# Altium PCB iotv3 595.PcbDoc
Units mm, origin at the board's own origin, x right, y up, seen from the top; angles counter-clockwise.
Board outline 152.4 x 101.6 mm, 2 copper layers (Top Layer, Bottom Layer); 7 components, 13 nets, 35 pads, 0 vias.
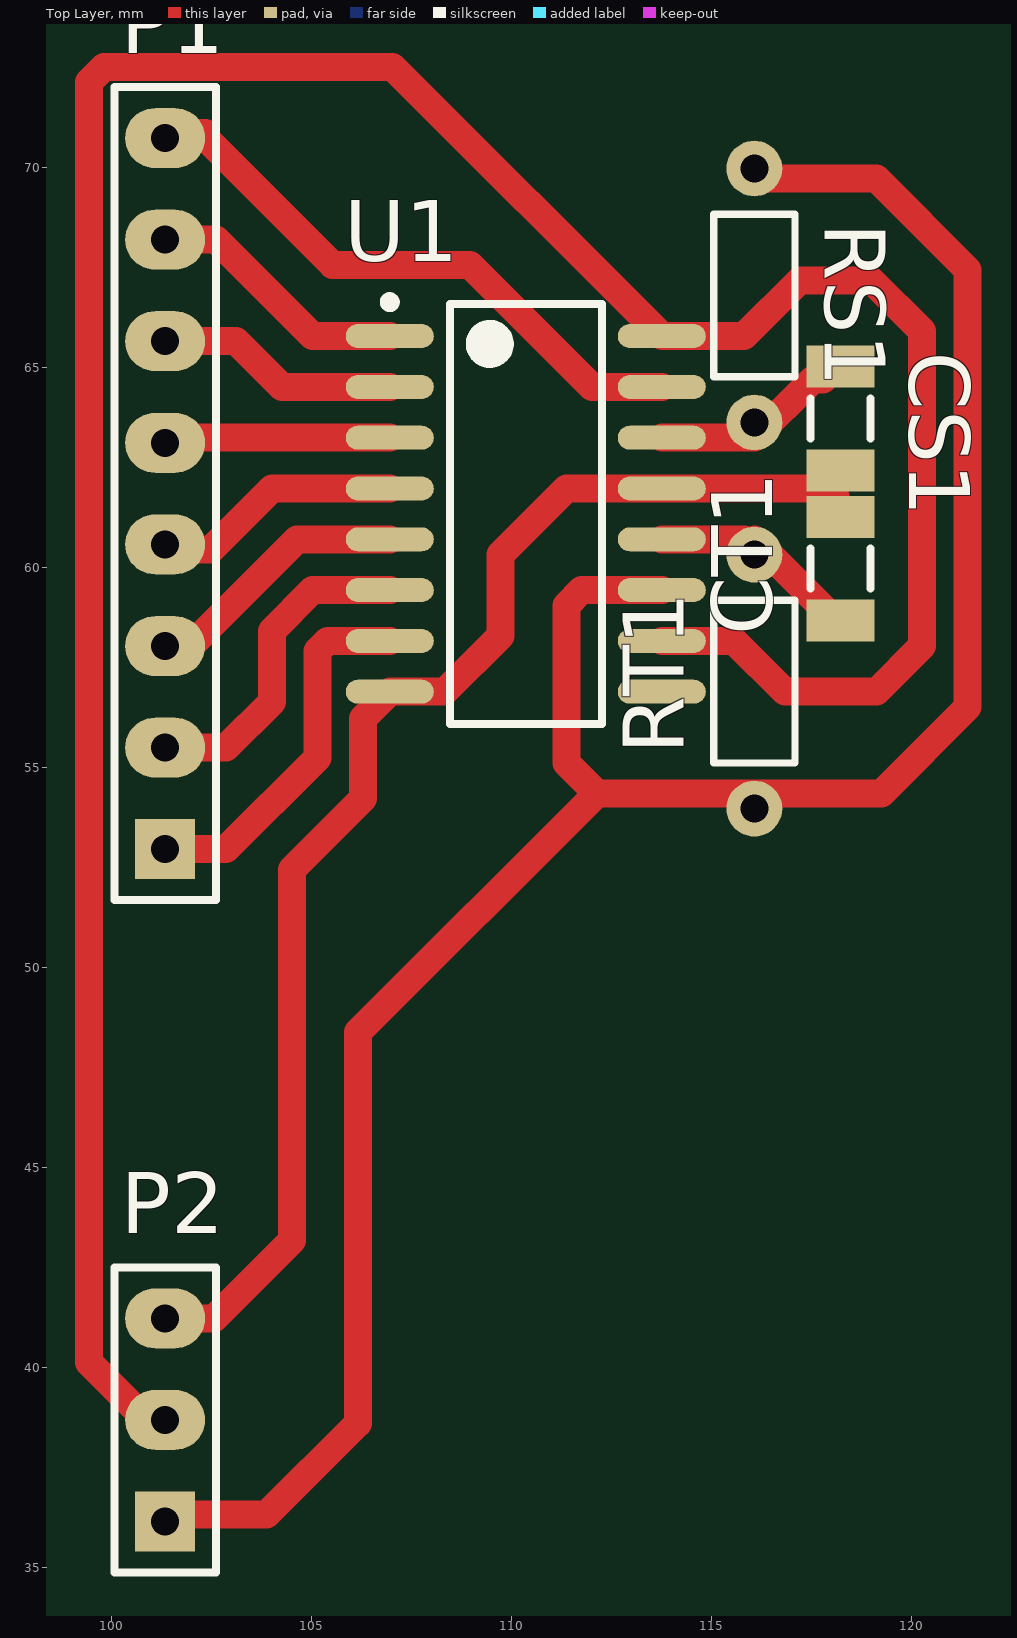
[diagram p0: Top Layer view]
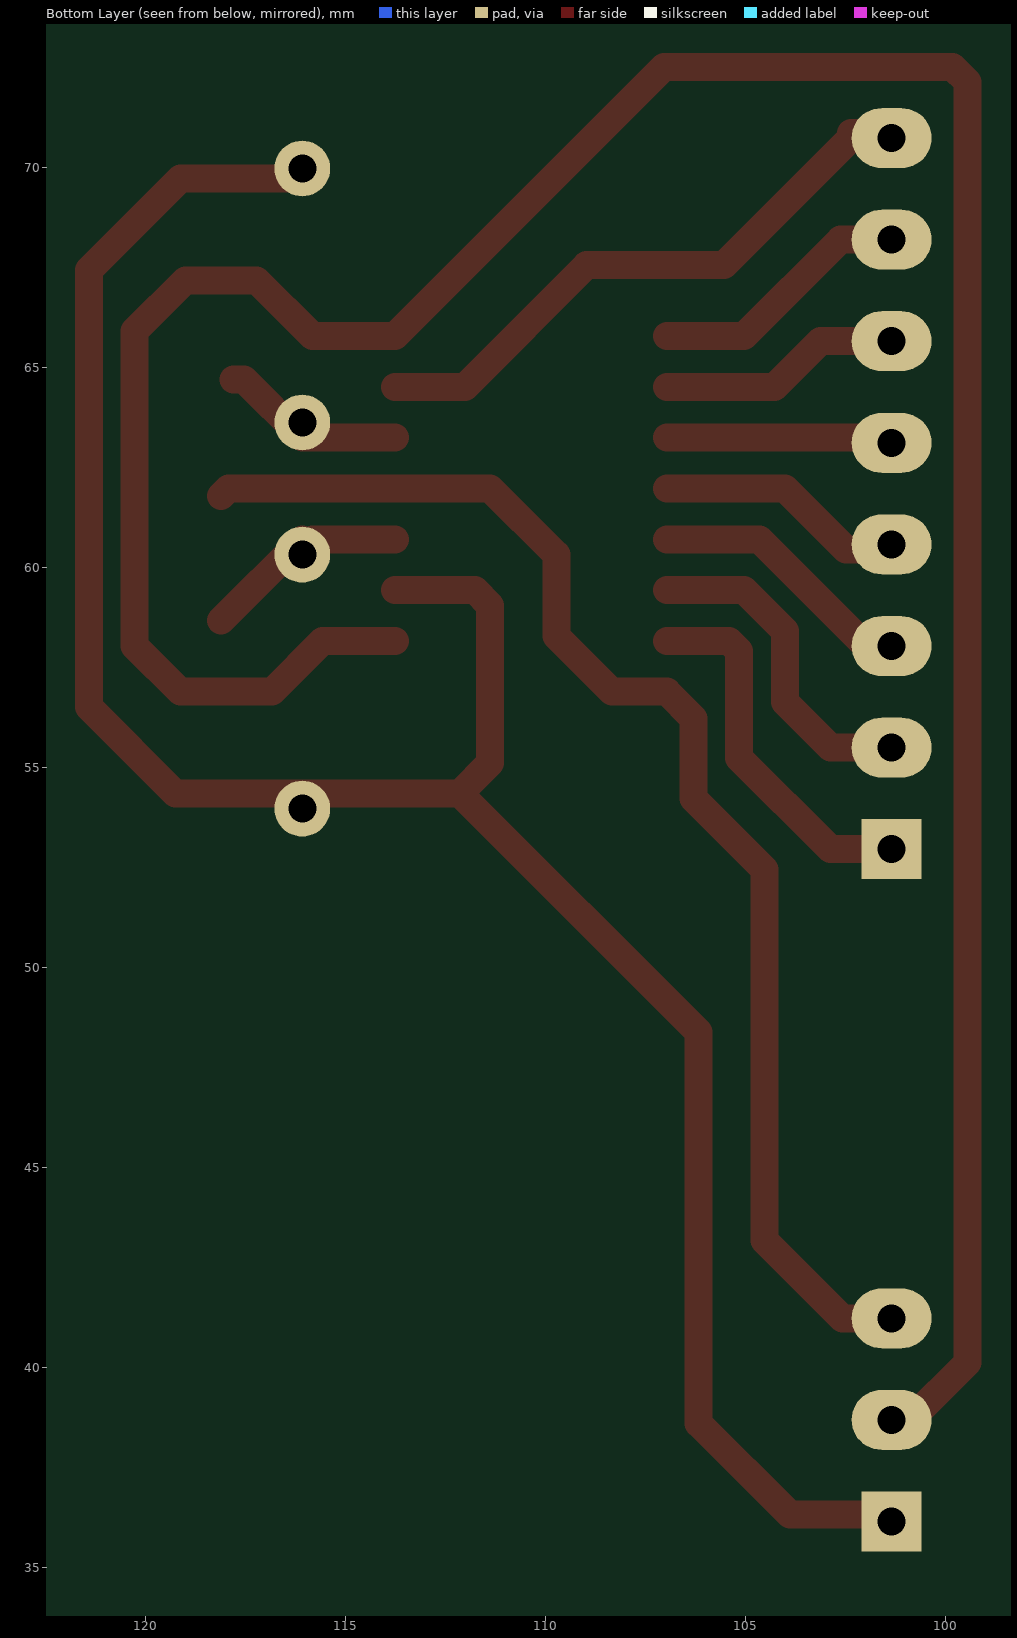
[diagram p1: Bottom Layer view, seen from below]
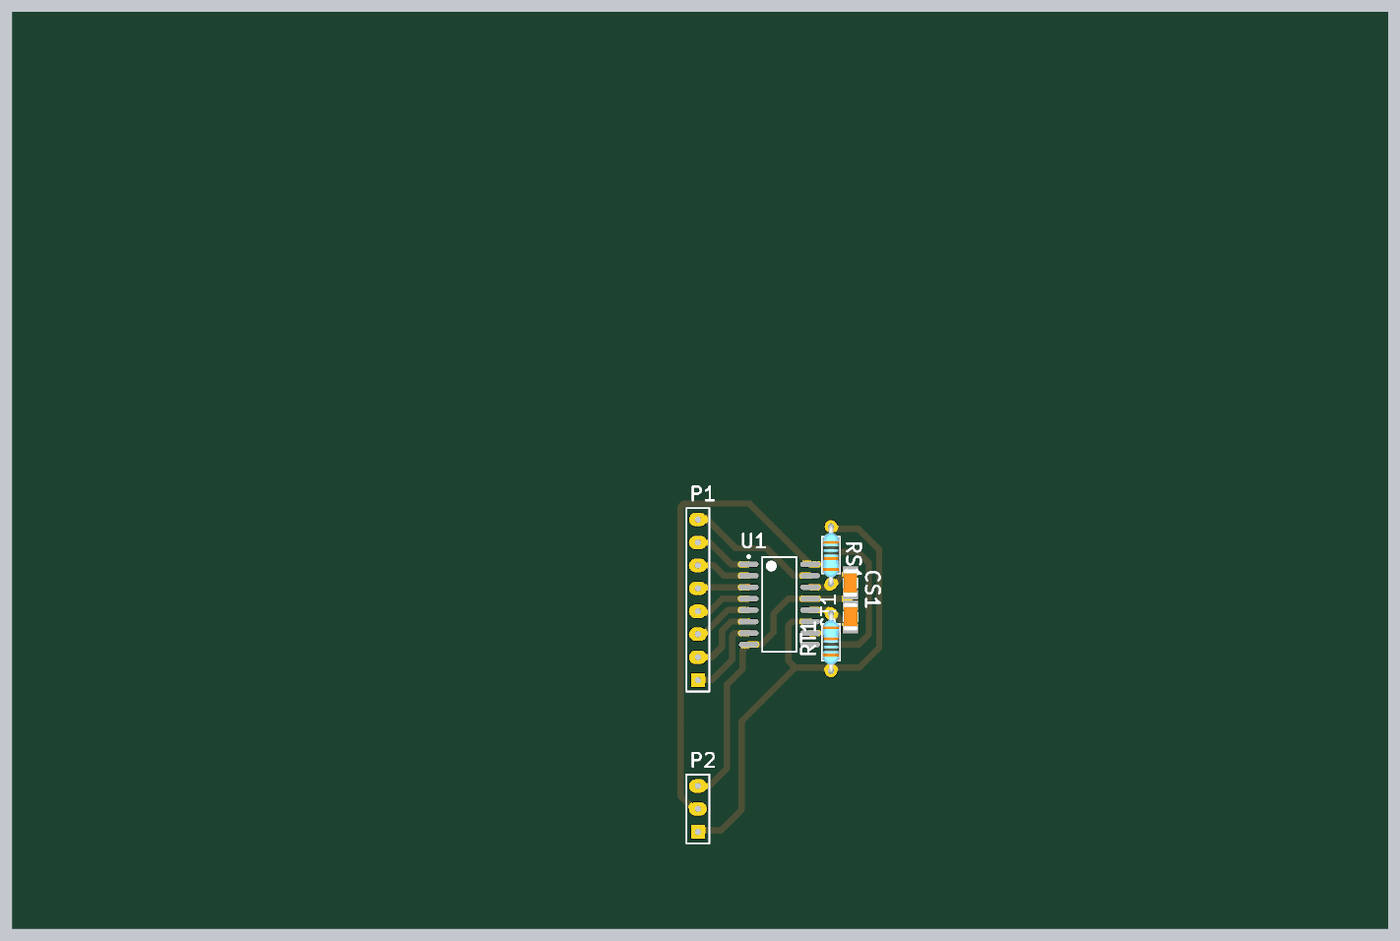
[diagram p2: 3D render of the assembled board from above, using the file's embedded part models]

## Layer stack, top to bottom
Top Solder: solder mask 0.0102, Solder Resist, Dk 3.5
Top Layer: signal copper 0.0356
Dielectric 1: dielectric 0.32, FR-4, Dk 4.8
Bottom Layer: signal copper 0.0356
Bottom Solder: solder mask 0.0102, Solder Resist, Dk 3.5

## Board outline
25.4,25.4 177.8,25.4 177.8,127 25.4,127

## Design rules (kind name [scope] priority, off if disabled: settings)
Clearance [All] p1: gap=0.254 ignorepadtopadclearanceinfootprint=FALSE except(0: Arc-Hole Track-Hole SMDPad-Hole THPad-Hole Via-Hole Fill-Hole Poly-Hole Region-Hole Text-Hole)
PolygonConnect [All] p1: connectstyle=Relief reliefconductorwidth=0.254 reliefentries=4 polygonreliefangle="90 Angle" airgapwidth=0.254
RoomDefinition "iotv3 595" [InComponentClass('iotv3 595')] p1: confinementstyle=ConfineIn formatcopy=TRUE lockcomponents=FALSE outline 178.943,24.384 218.694,24.384 218.694,47.752 178.943,47.752
RoutingVias [All] p1: holewidth=0.711 width=1.27 viastyle="Through Hole" minholewidth=0.711 minwidth=1.27 maxholewidth=0.711 maxwidth=1.27
SolderMaskExpansion [All] p1: expansion=0.102
Width [All] p1: maxlimit=2 minlimit=0.5 preferedwidth=1
30 further rules are at their usual default settings.

## Components (designator, comment, footprint, x,y, rotation, side; value= is the part's Value field where it differs from the comment)
CS1 "Value" "CAP 1206" 118.237,63.754 r270 top
CT1 "Value" "CAP 1206" 118.237,59.944 r90 top
P1 "Header 8" HDR1X8 101.346,52.959 r90 top
P2 "Header 3" HDR1X3 101.346,36.152 r90 top
RS1 "10K" Res-(1/4) 116.078,66.802 r270 top
RT1 "10K" Res-(1/4) 116.078,57.15 r90 top
U1 "MC74VHC595M" 966-01_N 110.363,61.341 r0 top

## Footprints (in the part's own frame and the unit in brackets; to place one, negate y for a bottom-side part, rotate by r counter-clockwise, add the part's x,y. Pads: shape width x height; smd on the part's side, far side on the other; paste and mask are expansions set on the pad)
966-01_N [mm] "SOP, 16-Leads, Body 10.2x5.3mm, Pitch 1.27mm, IPC Medium Density"
  oval 2.2x0.6 smd: 1(-3.4,4.445) 2(-3.4,3.175) 3(-3.4,1.905) 4(-3.4,0.635) 5(-3.4,-0.635) 6(-3.4,-1.905) 7(-3.4,-3.175) 8(-3.4,-4.445) 9(3.4,-4.445) 10(3.4,-3.175) 11(3.4,-1.905) 12(3.4,-0.635) 13(3.4,0.635) 14(3.4,1.905) 15(3.4,3.175) 16(3.4,4.445)
  silkscreen extent -3.52,-5.25 1.9,5.42, body extent -2.7,-5.25 2.7,5.25, height 2.05
"CAP 1206" [mm]
  rect 1.05x1.7 smd: 1(-1.27,0) 2(1.326,0)
  silkscreen extent -0.47,-0.75 0.53,0.75, body extent -1.49,-0.77 1.55,0.75, height 0.75
HDR1X3 [mm] "Connector; Header; 3 Position"
  rect 1.5x1.5 hole 0.7: 1(0,0)
  oval 1.5x2 hole 0.7: 2(2.54,0) 3(5.08,0)
  silkscreen extent -1.27,-1.27 6.35,1.27
HDR1X8 [mm] "Connector; Header; 8 Position"
  rect 1.5x1.5 hole 0.7: 1(0,0)
  oval 1.5x2 hole 0.7: 2(2.54,0) 3(5.08,0) 4(7.62,0) 5(10.16,0) 6(12.7,0) 7(15.24,0) 8(17.78,0)
  silkscreen extent -1.27,-1.27 19.05,1.27
Res-(1/4) [mil]
  round 55 hole 27.56: 1(-125,0) 2(125,0)
  silkscreen extent -80,-40 80,40, body extent -135,-36 135,36, height 115

## Part data
CS1 CT1: library part Capacitor, "Capacitor"
P1: "Header, 8-Pin", LatestRevisionDate=17-Jul-2002, LatestRevisionNote="Re-released for DXP Platform.", Publisher="Altium Limited"
P2: "Header, 3-Pin", LatestRevisionDate=17-Jul-2002, LatestRevisionNote="Re-released for DXP Platform.", Publisher="Altium Limited"
RS1 RT1: library part Resistor, "Resistor", Power="1/4 W", Tolerance=5%
U1: "8-Bit 3-State Shift Register with Output Storage Register", ComponentAvailability="Not for New Design", ComponentLink1Description="Manufacturer Link", ComponentLink1URL=http://www.onsemi.com/, ComponentLink2Description=Datasheet, ComponentLink2URL=http://www.onsemi.com/pub/Collateral/MC74VHC595-D.PDF, DatasheetVersion=1997, LatestRevisionDate=13-Apr-2006, LatestRevisionNote="IPC-7351 Footprint Added.", PackageDescription="16-Pin Small Outline Package 1.27 mm Pitch", PackageReference=966-01, PackageVersion=1997, Published=15-Apr-2002, Publisher="Altium Limited"

## Nets (pads, with @x,y where several pads share a name; then routed paths per layer and width w, separated by ;. In a path a pad name is that pad's centre, name@x,y a point inside that pad or via, vN(x,y) a via of type N, cw(c..) or ccw(c..) an arc to the next point about the centre after c; other vN are vias at no path point)
GND: CS1.2 CT1.2 P2.3 U1.8 U1.13 | length 33.2
  Top Layer w0.7: P2.3 102.573,41.232 104.521,43.18 104.521,52.451 106.299,54.229 106.299,56.232 U1.8 108.331,56.896 109.728,58.293 109.728,60.325 111.379,61.976 U1.13 117.927,61.976 CT1.2@118.11,61.793
i1: P1.1 U1.7 | length 9.3
  Top Layer w0.7: P1.1 102.87,52.959 105.156,55.245 105.156,57.912 105.41,58.166 U1.7
i2: P1.2 U1.6 | length 8.3
  Top Layer w0.7: P1.2 102.87,55.499 104.013,56.642 104.013,58.42 105.029,59.436 U1.6
i3: P1.3 U1.5 | length 6.8
  Top Layer w0.7: P1.3 101.473,57.912 101.854,57.912 104.648,60.706 U1.5
i4: P1.4 U1.4 | length 6.3
  Top Layer w0.7: P1.4 101.473,60.452 102.489,60.452 104.013,61.976 U1.4
i5: P1.5 U1.3 | length 5.7
  Top Layer w0.7: P1.5 101.473,63.246 U1.3
i6: P1.6 U1.2 | length 6.1
  Top Layer w0.7: P1.6 103.124,65.659 104.267,64.516 U1.2
i7: P1.7 U1.1 | length 6.6
  Top Layer w0.7: P1.7 102.616,68.199 105.029,65.786 U1.1
i8: P1.8 U1.15 | length 15.2
  Top Layer w0.7: P1.8 101.473,70.866 102.362,70.866 102.362,70.739 105.537,67.564 108.966,67.564 112.014,64.516 U1.15
NetCS1_1: CS1.1 RS1.2 U1.14 | length 4.6
  Top Layer w0.7: U1.14 116.078,63.246 117.538,64.706 CS1.1@117.792,64.706
NetCT1_1: CT1.1 RT1.2 U1.12 | length 4.9
  Top Layer w0.7: U1.12 RT1.2@115.824,60.706 ; RT1.2@116.078,60.706 CT1.1@118.11,58.674
out: P2.1 RS1.1 RT1.1 U1.11 | length 58.9
  Top Layer w0.7: P2.1 101.516,36.322 103.886,36.322 106.172,38.608 106.172,48.387 112.141,54.356 ; U1.11 111.76,59.436 111.379,59.055 111.379,55.118 112.141,54.356 ; RS1.1@116.205,69.723 119.126,69.723 121.412,67.437 121.412,56.515 119.253,54.356 112.141,54.356
vdd: P2.2 U1.10 U1.16 | length 74.8
  Top Layer w0.7: P2.2 100.881,38.692 99.441,40.132 99.441,72.136 99.822,72.517 107.032,72.517 U1.16 115.824,65.786 117.221,67.183 118.999,67.183 120.269,65.913 120.269,58.039 119.126,56.896 116.84,56.896 115.57,58.166 U1.10
pads on no net: U1.9